# Altium PCB USBtinyISP.PcbDoc
Units mm, origin at the board's own origin, x right, y up, seen from the top; angles counter-clockwise.
Board outline 55 x 25 mm, 2 copper layers (Top Layer, Bottom Layer); 18 components, 17 nets, 64 pads, 0 vias.
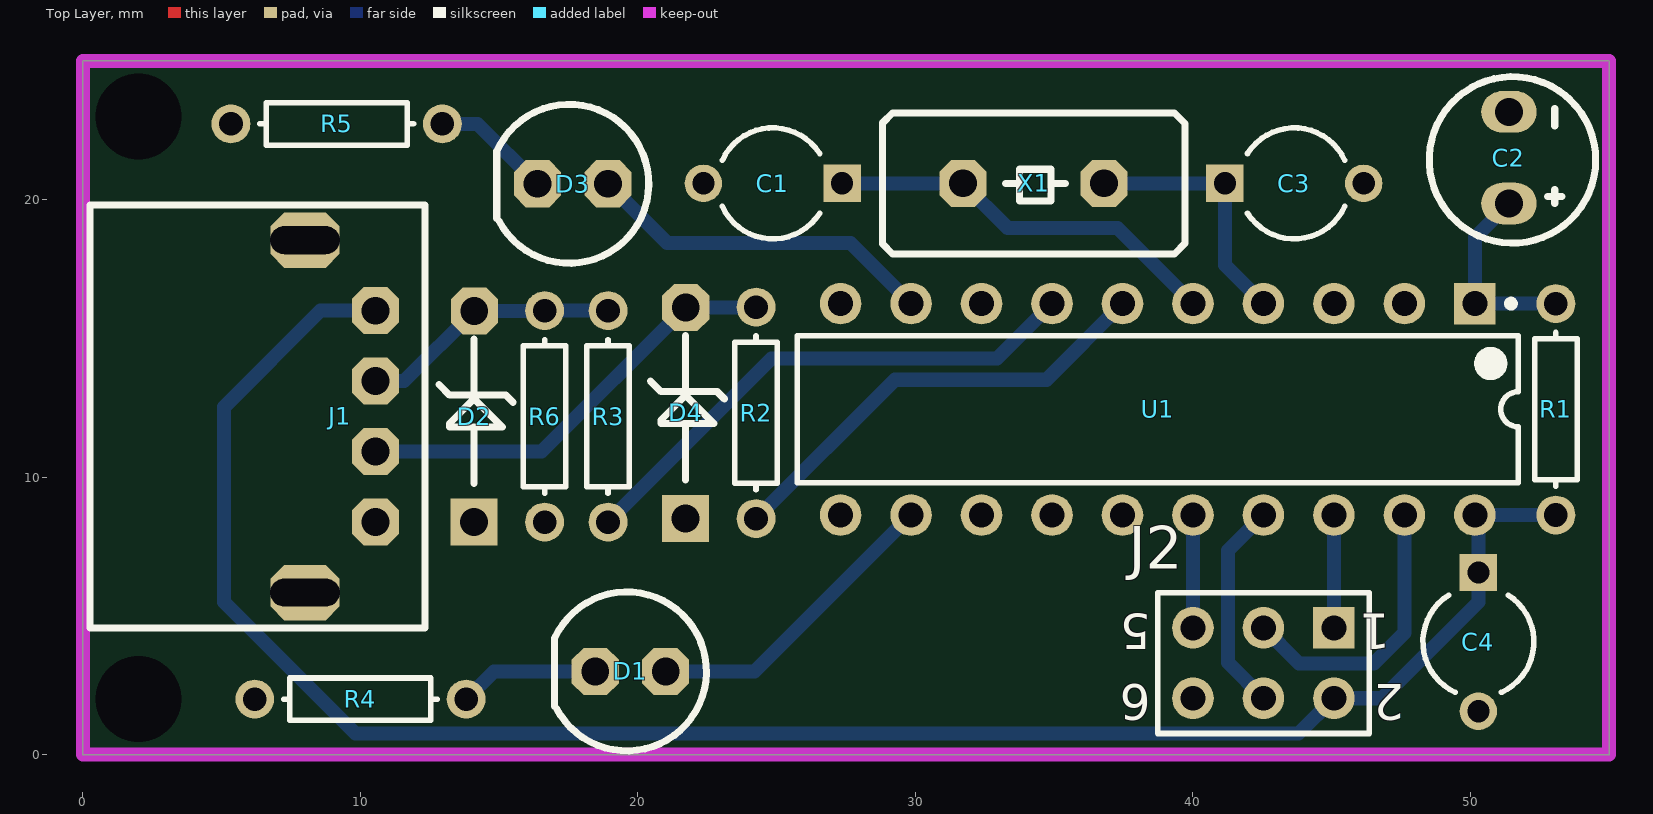
[diagram p0: Top Layer view]
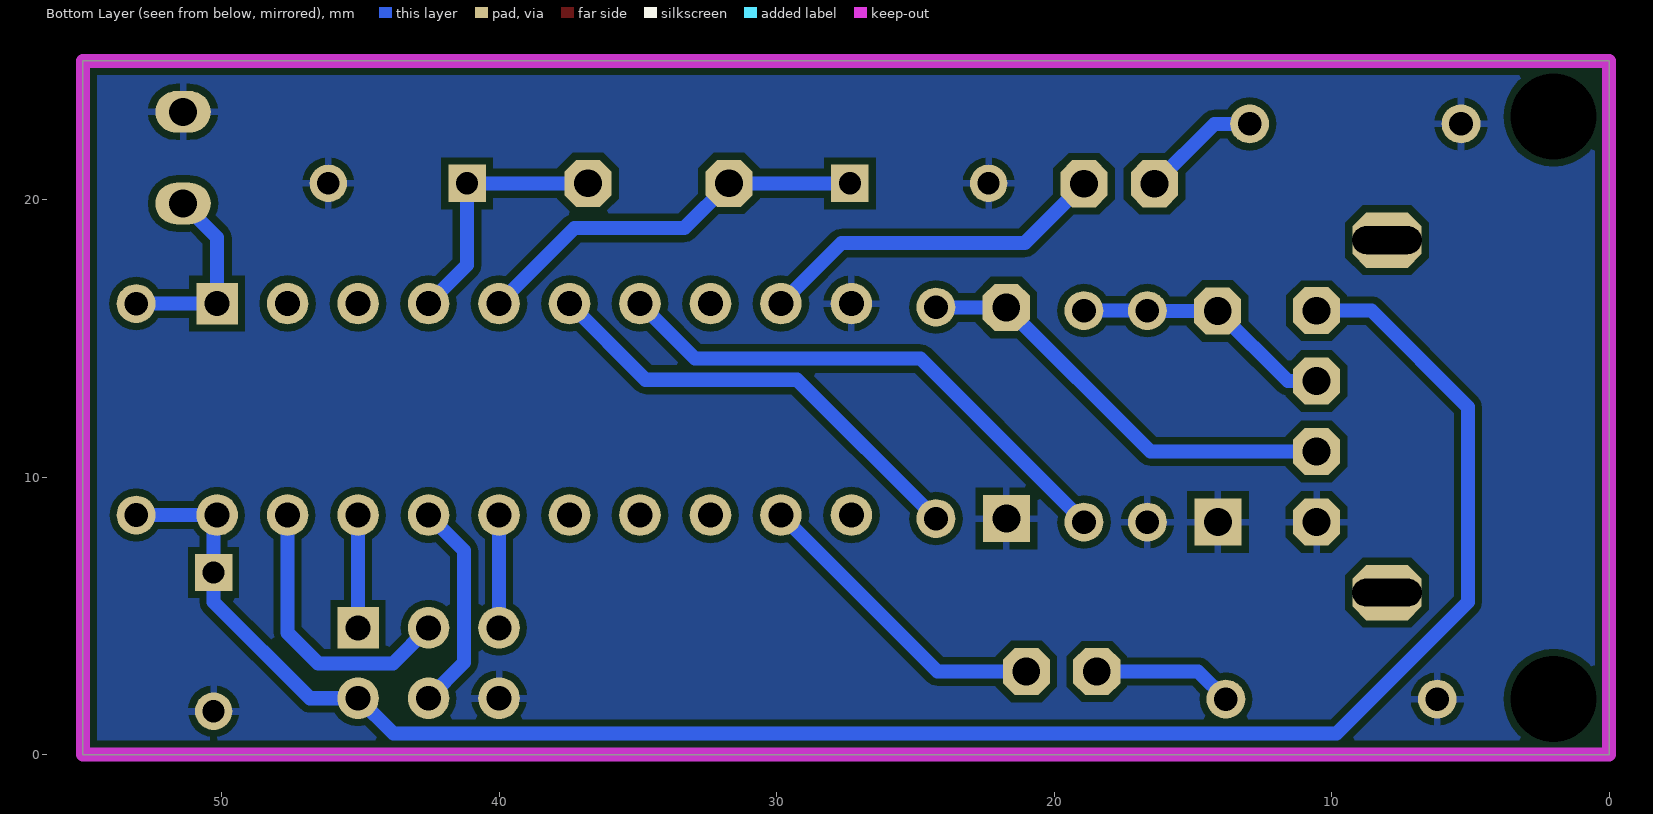
[diagram p1: Bottom Layer view, seen from below]

## Layer stack, top to bottom
Top Solder: solder mask 0.0102, Solder Resist, Dk 3.5
Top Layer: signal copper 0.0356
Dielectric 1: dielectric 0.32, FR-4, Dk 4.8
Bottom Layer: signal copper 0.0356
Bottom Solder: solder mask 0.0102, Solder Resist, Dk 3.5

## Board outline
0,0 55,0 55,25 0,25

## Design rules (kind name [scope] priority, off if disabled: settings)
Clearance [All] p1: gap=0.254
PolygonConnect [All] p1: connectstyle=Relief reliefconductorwidth=0.254 reliefentries=4 polygonreliefangle="90 Angle" airgapwidth=0.254
RoutingVias [All] p1: holewidth=0.711 width=1.27 viastyle="Through Hole" minholewidth=0.711 minwidth=1.27 maxholewidth=0.711 maxwidth=1.27
SolderMaskExpansion [All] p1: expansion=0.102
UnpouredPolygon [All] p1: allowunpoured=FALSE
Width [All] p1: maxlimit=2.032 minlimit=0.254 preferedwidth=0.254
29 further rules are at their usual default settings.

## Components (designator, comment, footprint, x,y, rotation, side; value= is the part's Value field where it differs from the comment)
C1 "Cap2" CAPR5-4X5 24.861,20.59 r180 top
C2 "Capacitor Polar" CAP-ELECTROLITE 51.394,19.864 r90 top
C3 "Cap2" CAPR5-4X5 43.657,20.59 r0 top
C4 "Cap2" CAPR5-4X5 50.292,4.064 r270 top
D1 "Led Red" LED-RED 21,3 r180 top
D2 "Zenor Diode" "D Zener" 14.097,8.382 r90 top
D3 "Led Green" LED-GREEN 18.923,20.574 r180 top
D4 "Zenor Diode" "D Zener" 21.717,8.509 r90 top
J1 "USB A Top_F" "USB Type A" 0.254,4.572 r0 top
J2 "Header 3X2" HDR2X3 45.085,4.572 r180 top
R1 "Res1" AXIAL-0.3 53.086,12.446 r270 top
R2 "Res1" AXIAL-0.3 24.257,12.319 r270 top
R3 "Res1" AXIAL-0.3 18.923,12.192 r270 top
R4 "Res1" AXIAL-0.3 10,2 r0 top
R5 "Res1" AXIAL-0.3 9.144,22.733 r0 top
R6 "Res1" AXIAL-0.3 16.637,12.192 r90 top
U1 "ATtiny2313-20PU" 20P3 38.735,12.446 r270 top
X1 "Crystal Small" XTAL-SMALL 36.799,20.59 r180 top

## Footprints (in the part's own frame and the unit in brackets; to place one, negate y for a bottom-side part, rotate by r counter-clockwise, add the part's x,y. Pads: shape width x height; smd on the part's side, far side on the other; paste and mask are expansions set on the pad)
20P3 [mm] "DIP, 20-Leads, Row Spacing 7.62mm, Pitch 2.54mm, Body 25.9x6.61mm"
  rect 1.5x1.5 hole 0.9: 1(-3.81,11.43)
  round 1.5 hole 0.9: 2(-3.81,8.89) 3(-3.81,6.35) 4(-3.81,3.81) 5(-3.81,1.27) 6(-3.81,-1.27) 7(-3.81,-3.81) 8(-3.81,-6.35) 9(-3.81,-8.89) 10(-3.81,-11.43) 11(3.81,-11.43) 12(3.81,-8.89) 13(3.81,-6.35) 14(3.81,-3.81) 15(3.81,-1.27) 16(3.81,1.27) 17(3.81,3.81) 18(3.81,6.35) 19(3.81,8.89) 20(3.81,11.43)
  silkscreen extent -3.93,-13 2.65,13, body extent -3.6,-12.95 3.6,12.95, height 5.34
AXIAL-0.3 [mm] "Axial Device, Thru-Hole; 2 Leads; 0.3 in Pin Spacing"
  round 1.4 hole 0.85: 1(-3.81,0) 2(3.81,0)
  silkscreen extent -2.77,-0.76 2.77,0.76
CAP-ELECTROLITE [mm]
  oval 1.5x2 hole 1: 1(0,0) 2(3.302,0)
  silkscreen extent -1.43,-3.13 4.57,2.87, body extent -1.5,-3.17 4.57,2.91, height 10.1
CAPR5-4X5 [mm] "Capacitor; 2 Leads"
  rect 1.35x1.35 hole 0.8: 1(-2.5,0)
  round 1.35 hole 0.8: 2(2.5,0)
  silkscreen extent -1.69,-2 1.82,2
"D Zener" [mm]
  rect 1.7x1.7 hole 1: 1(0,0)
  oct 1.7x1.7 hole 1: 2(7.61,-0.009)
  silkscreen extent 1.4,-1.4 6.6,1.27, body extent -0.51,-1.02 8.1,0.98, height 3
HDR2X3 [mm] "Connector; Header; 3x2 Position"
  rect 1.5x1.5 hole 0.9: 1(0,0)
  round 1.5 hole 0.9: 2(0,2.54) 3(2.54,0) 4(2.54,2.54) 5(5.08,0) 6(5.08,2.54)
  silkscreen extent -1.27,-1.27 6.35,3.81
LED-GREEN [mm] "5mm-LED"
  oct 1.7x1.7 hole 1: 1(0,0) 2(2.54,0)
  silkscreen extent -1.47,-2.86 4.01,2.86, body extent -1.4,-2.92 4.18,2.67, height 9
LED-RED [mm] "5mm-LED"
  oct 1.7x1.7 hole 1: 1(0,0) 2(2.54,0)
  silkscreen extent -1.47,-2.86 4.01,2.86, body extent -1.4,-2.92 4.18,2.67, height 9
"USB Type A" [mm] "Standard-A"
  oct 2.5x2 hole 1 slot 2.5 at 0 deg: 0(7.747,1.27) 0(7.747,13.97)
  oct 1.7x1.7 hole 1: 1(10.287,11.43) 2(10.287,8.89) 3(10.287,6.35) 4(10.287,3.81)
  silkscreen extent 0,0 12.06,15.24, body extent 0,0 12.06,15.24, height 6
XTAL-SMALL [mm] "HC-49/S package"
  oct 1.7x1.7 hole 1: 1(0,0) 2(5.08,0)
  silkscreen extent -2.92,-2.54 7.98,2.54, body extent -2.92,-2.54 8.01,2.54, height 4.25

## Part data
C1 C3 C4: "Capacitor"
C2: library part "Cap- polarized"
J2: "Header, 3-Pin, Dual row"
R1 R2 R3 R4 R5 R6: "Resistor"
U1: "Low Power tinyAVR® 8-Bit Microcontroller, 2K Flash Memory, 20MHz, Industrial Temperature, 20-Lead PDIP, Pb-Free"
X1: "Crystal Oscillator"

## Free pads (board coordinates)
  round 0 hole 3.1 unplated: 0(2,23) 1(2,2)

## Nets (pads, with @x,y where several pads share a name; then routed paths per layer and width w, separated by ;. In a path a pad name is that pad's centre, name@x,y a point inside that pad or via, vN(x,y) a via of type N, cw(c..) or ccw(c..) an arc to the next point about the centre after c; other vN are vias at no path point)
D+: D4.2 J1.3 R2.1 | length 15.9
  Bottom Layer w0.508: J1.3 16.529,10.922 D4.2 24.247,16.119 R2.1
D-: D2.2 J1.2 R3.1 R6.2 | length 9.4
  Bottom Layer w0.508: J1.2 11.576,13.462 D2.2 16.627,15.992 R6.2 R3.1
GND: C1.2 C2.2 C3.2 C4.2 D2.1 D4.1 J1.4 J2.6 R4.1 R5.1 R6.1 U1.10
MISO': J2.1 U1.18 | length 4.1
  Bottom Layer w0.508: J2.1 U1.18
MOSI': J2.4 U1.17 | length 7.7
  Bottom Layer w0.508: J2.4 41.263,3.314 41.263,7.354 U1.17
PB0: D1.1 U1.12 | length 11.2
  Bottom Layer w0.508: D1.1 24.209,3 U1.12
PD2: R2.2 U1.6 | length 16.4
  Bottom Layer w0.508: R2.2 29.261,13.513 34.722,13.513 U1.6
PD3: R3.2 U1.7 | length 19.3
  Bottom Layer w0.508: R3.2 24.816,14.275 32.944,14.275 U1.7
PD5: D3.1 U1.9 | length 12.7
  Bottom Layer w0.508: D3.1 21.057,18.44 27.661,18.44 U1.9
RESET: C2.1 R1.1 U1.1 | length 7
  Bottom Layer w0.508: C2.1 50.165,18.635 U1.1 R1.1
RLED1: D1.2 R4.2 | length 5.1
  Bottom Layer w0.508: R4.2 14.81,3 D1.2
RLED2: D3.2 R5.2 | length 4.3
  Bottom Layer w0.508: R5.2 14.224,22.733 D3.2
RST: J2.5 U1.16 | length 4.1
  Bottom Layer w0.508: J2.5 U1.16
SCK': J2.3 U1.19 | length 10.3
  Bottom Layer w0.508: J2.3 43.827,3.29 46.521,3.29 47.625,4.394 U1.19
VCC: C4.1 J1.1 J2.2 R1.2 U1.20 | length 69.2
  Bottom Layer w0.508: J1.1 8.56,16.002 5.08,12.522 5.08,5.499 9.817,0.762 43.815,0.762 J2.2 46.825,2.032 50.292,5.499 C4.1 50.292,8.509 U1.20 R1.2
XTAL1: C1.1 U1.5 X1.2 | length 14.4
  Bottom Layer w0.508: C1.1 X1.2 33.331,18.978 37.283,18.978 U1.5
XTAL2: C3.1 U1.4 X1.1 | length 9.3
  Bottom Layer w0.508: X1.1 C3.1 41.157,17.644 U1.4
pads on no net: J1.0 U1.2 U1.3 U1.8 U1.11 U1.13 U1.14 U1.15

## Polygon pours and split planes (outlines as drawn)
GND on Bottom Layer "Top Layer-No Net" (solid, remove dead copper, pour order 2): 0,25 55,25 55,0 0,0

## Keep-outs
Keep-Out Layer:
  the board outline again, w0.508

## Dimensions
0,0 to 55,0 on Top Layer
0,25 to 0,0 on Top Layer

## Text inside footprints (layer, text, board x,y; h text height)
J2: Top Overlay "1" at 47.117,5.08 h1.27 r180; Top Overlay "2" at 47.625,2.54 h1.27 r180; Top Overlay "5" at 38.481,5.08 h1.27 r180; Top Overlay "6" at 38.481,2.54 h1.27 r180